# Altium PCB Juno_Light_Central.PcbDoc
Units mm, origin at the board's own origin, x right, y up, seen from the top; angles counter-clockwise.
Board outline 16 x 45 mm, 2 copper layers (Top Layer, Bottom Layer), stack 1.172 mm thick; 24 components, 23 nets, 120 pads, 33 vias.
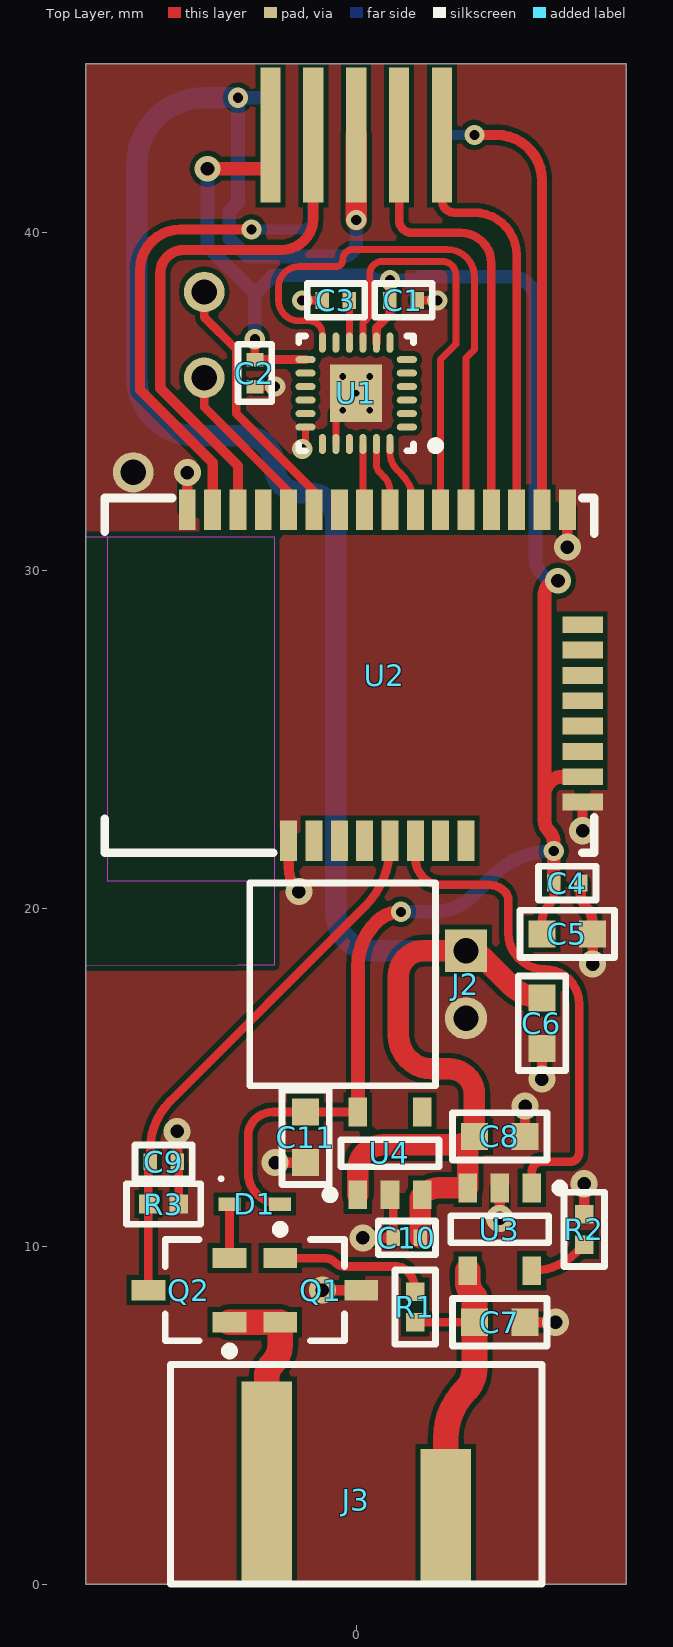
[diagram p0: Top Layer view]
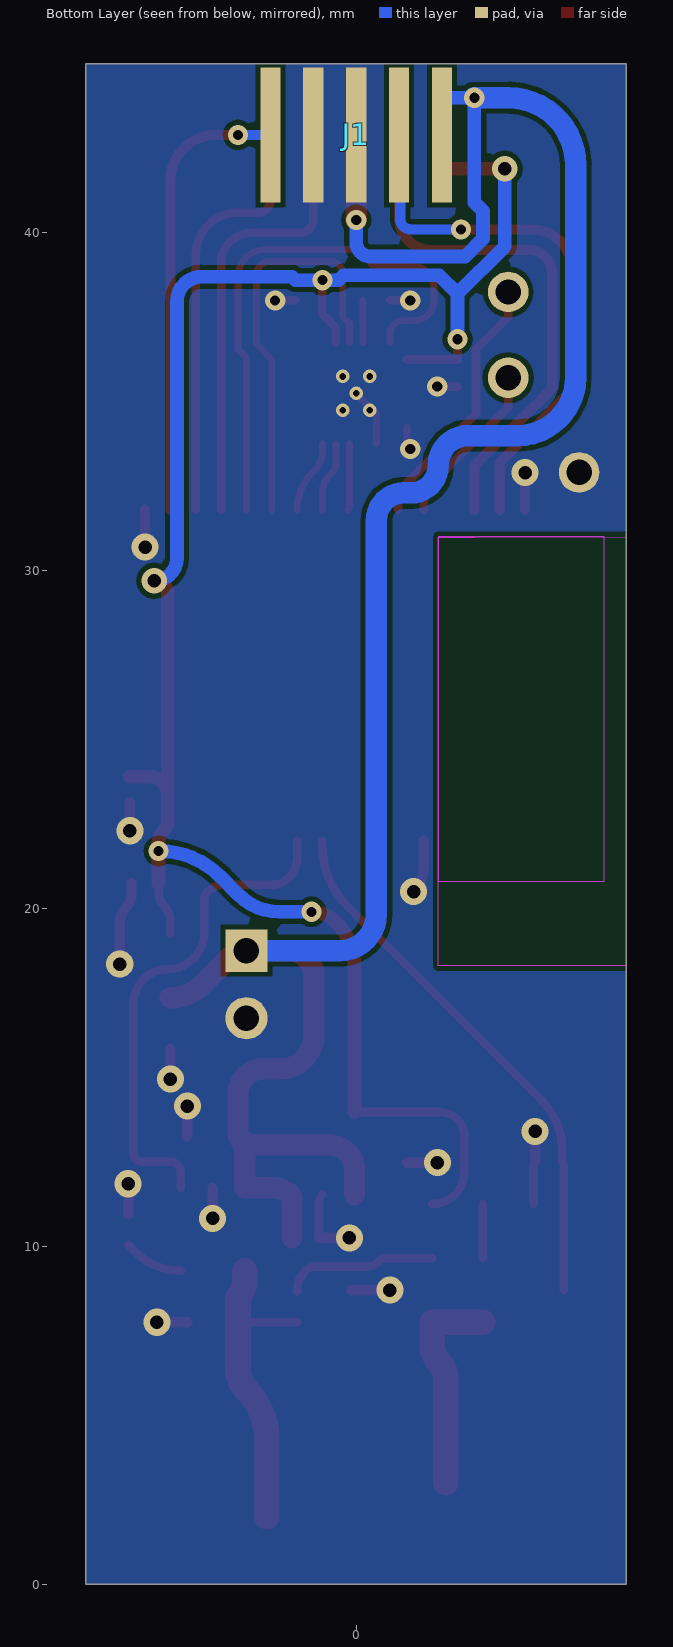
[diagram p1: Bottom Layer view, seen from below]
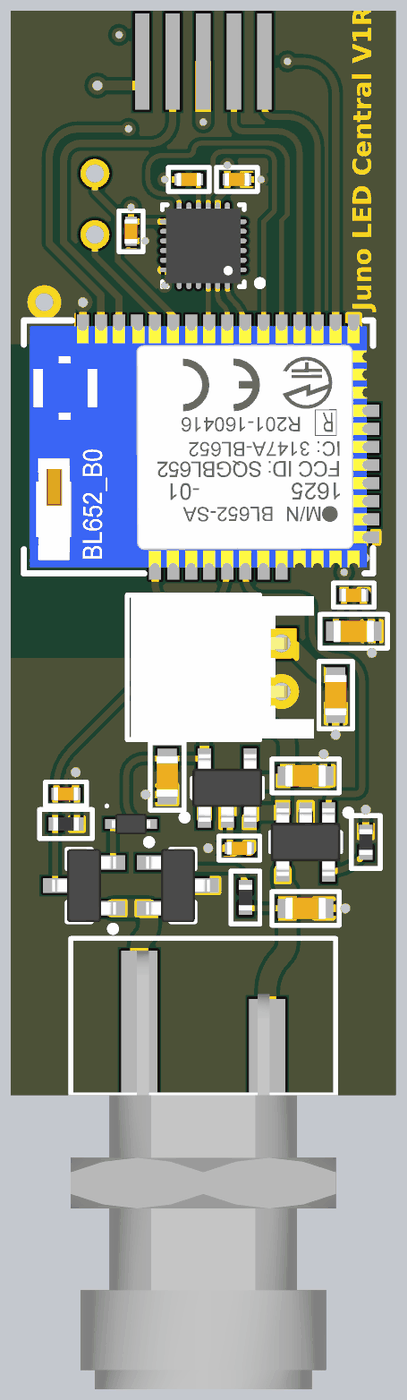
[diagram p2: 3D render of the assembled board from above, using the file's embedded part models]

## Layer stack, top to bottom
Top Solder: solder mask 0.0102, Solder Resist, Dk 3.5
Top Layer: signal copper 0.0356
Dielectric 1: dielectric 1.1004, FR-4, Dk 4.8
Bottom Layer: signal copper 0.0356
Bottom Solder: solder mask 0.0102, Solder Resist, Dk 3.5

## Board outline
-8,0 -8,45 8,45 8,0

## Design rules (kind name [scope] priority, off if disabled: settings)
Clearance [All] p1: gap=0.152 ignorepadtopadclearanceinfootprint=FALSE
PlaneConnect [All] p1: planeconnectstyle=Direct reliefexpansion=0.508 reliefentries=4 reliefconductorwidth=0.254 reliefairgap=0.254
PolygonConnect [All] p1: connectstyle=Direct reliefconductorwidth=0.254 reliefentries=4 polygonreliefangle="90 Angle" airgapwidth=0.254
RoutingVias [All] p1: holewidth=0.711 width=1.27 viastyle="Through Hole" minholewidth=0.711 minwidth=1.27 maxholewidth=0.711 maxwidth=1.27
SolderMaskExpansion [All] p1: expansion=0.102
Width [All] p1: maxlimit=0.762 minlimit=0.152 preferedwidth=0.254
29 further rules are at their usual default settings.

## Components (designator, comment, footprint, x,y, rotation, side; value= is the part's Value field where it differs from the comment)
C1 "0.1uF" C0402 1.4,38 r0 top
C2 "0.01uF" C0402 -3,35.85 r270 top
C3 "0.1uF" C0402 -0.6,38 r180 top
C4 "0.1uF" C0402 6.25,20.75 r180 top
C5 "4.7uF" C0603 6.25,19.25 r0 top
C6 "4.7uF" C0603 5.5,16.6 r270 top
C7 "4.7uF" C0603 4.25,7.75 r0 top
C8 "4.7uF" C0603 4.25,13.25 r0 top
C9 "1uF" C0402 -5.7,12.5 r0 top
C10 "1uF" C0402 1.5,10.25 r180 top
C11 "4.7uF" C0603 -1.5,13.225 r270 top
D1 "1N4148X-TP" SOD-523 -3,11.25 r0 top
J1 "PADS" Pads 0,42.9 r180 bottom
J2 "BATT" S2B-PH-K-S 4.6,17.75 r90 top
J3 "2.1mm Barrel Power Jack" "2.1mm Power Jack" 0,0 r180 top
Q1 "N-FET" SOT-23-3 -1.05,8.7 r0 top
Q2 "PNP DARLINGTON" SOT-23-3 -4.95,8.7 r180 top
R1 "100" R0402 1.75,8.2 r90 top
R2 "2K" R0402 6.75,10.5 r90 top
R3 "1M" R0402 -5.7,11.25 r180 top
U1 "MPU-6500" QFN-24 0,35.25 r180 top
U2 "BL652-SA-01" BL652-SA-01 6.8,26.9 r90 top
U3 "BATT_CHRG" SOT-23-5 4.25,10.5 r270 top
U4 "TPS76333DBVT" SOT-23-5 1,12.75 r90 top

## Footprints (in the part's own frame and the unit in brackets; to place one, negate y for a bottom-side part, rotate by r counter-clockwise, add the part's x,y. Pads: shape width x height; smd on the part's side, far side on the other; paste and mask are expansions set on the pad)
"2.1mm Power Jack" [mm]
  rect 1.5x4 smd: 1(-2.65,-2)
  rect 1.5x6 smd: 2(2.65,-3)
  silkscreen extent -5.5,-6.5 5.5,0, body extent -5.5,-5.99 5.5,12.2, height 7.55
BL652-SA-01 [mm]
  rect 1.2x0.5 smd: 1(4.9,11.8) 2(4.9,11.05) 3(4.9,10.3) 4(4.9,9.55) 5(4.9,8.8) 6(4.9,8.05) 7(4.9,7.3) 8(4.9,6.55) 9(4.9,5.8) 10(4.9,5.05) 11(4.9,4.3) 12(4.9,3.55) 13(4.9,2.8) 14(4.9,2.05) 15(4.9,1.3) 16(4.9,0.55) 32(-4.9,3.55) 33(-4.9,4.3) 34(-4.9,5.05) 35(-4.9,5.8) 36(-4.9,6.55) 37(-4.9,7.3) 38(-4.9,8.05) 39(-4.9,8.8)
  rect 0.5x1.2 smd: 20(1.5,0.1) 21(0.75,0.1) 22(0,0.1) 23(-0.75,0.1) 24(-1.5,0.1) 25(-2.25,0.1) 26(-3,0.1) 27(-3.75,0.1)
  Keep-Out Layer region: 4.1,9.225 -6.1,9.225 -6.1,14.15 4.1,14.15
  silkscreen extent -5.25,-0.25 5.25,14.25, body extent -5.01,0 5.01,14.01, height 2.9
C0402 [mm] "Chip Capacitor, 2-Leads, Body 1.00x0.50mm, IPC Medium Density"
  rect 0.4x0.5 smd: 1(-0.4,0) 2(0.4,0)
  silkscreen extent -0.85,-0.5 0.85,0.5, body extent -0.53,-0.28 0.53,0.28, height 0.55
C0603 [mm] "Chip Capacitor, 2-Leads, Body 1.60x0.80mm, IPC Medium Density"
  rect 0.8x0.8 smd: 1(-0.75,0) 2(0.75,0)
  silkscreen extent -1.4,-0.7 1.4,0.7, body extent -0.85,-0.45 0.85,0.45, height 0.9
Pads [mm]
  rect 0.6x4 smd: 1(-2.54,0) 2(-1.27,0) 3(0,0) 4(1.27,0) 5(2.54,0)
  rect 0.6x4 smd far side: 6(2.54,0) 7(1.27,0) 8(0,0) 9(-1.27,0) 10(-2.54,0)
QFN-24 [mm] "QFN, 24-Leads, Body 3.00x3.00mm, Pitch 0.40mm, Thermal Pad 1.54x1.70mm, IPC Medium Density"
  oval 0.6x0.2 smd: 1(-1.5,1) 2(-1.5,0.6) 3(-1.5,0.2) 4(-1.5,-0.2) 5(-1.5,-0.6) 6(-1.5,-1) 13(1.5,-1) 14(1.5,-0.6) 15(1.5,-0.2) 16(1.5,0.2) 17(1.5,0.6) 18(1.5,1)
  oval 0.2x0.6 smd: 7(-1,-1.5) 8(-0.6,-1.5) 9(-0.2,-1.5) 10(0.2,-1.5) 11(0.6,-1.5) 12(1,-1.5) 19(1,1.5) 20(0.6,1.5) 21(0.2,1.5) 22(-0.2,1.5) 23(-0.6,1.5) 24(-1,1.5)
  rect 1.54x1.7 smd: 25(0,0)
  silkscreen extent -2.48,-1.7 1.7,1.7, body extent -1.56,-1.56 1.56,1.56, height 0.9
R0402 [mm] "Chip Resistor, 2-Leads, Body 1.00x0.50mm, IPC Medium Density"
  rect 0.55x0.55 smd: 1(-0.45,0) 2(0.45,0)
  silkscreen extent -1.1,-0.6 1.1,0.6, body extent -0.53,-0.28 0.53,0.28, height 0.4
S2B-PH-K-S [mm]
  rect 1.25x1.25 hole 0.75: 1(1,1.35)
  round 1.25 hole 0.75: 2(-1,1.35)
  silkscreen extent -3,2.25 3,7.75, body extent -2.95,0 2.95,7.6, height 4.9
SOD-523 [mm] "SODFL, 2-Leads, Body 0.80x1.60mm, IPC Medium Density"
  rect 0.65x0.4 smd: 1(-0.75,0) 2(0.75,0)
  silkscreen extent -1.05,0.7 -0.95,0.8, body extent -0.8,-0.43 0.8,0.43, height 0.77
SOT-23-3 [mm] "SOT23, 3-Leads, Body 2.92x2.37mm, Pitch 0.95mm, IPC Medium Density"
  rect 1x0.6 smd: 1(-1.2,0.95) 2(-1.2,-0.95) 3(1.2,0)
  silkscreen extent -1.32,-1.5 0.7,1.92, body extent -1.32,-1.52 1.32,1.52, height 1.1
SOT-23-5 [mm] "SOT23, 5-Leads, Body 2.90x2.80mm, Pitch 0.95mm, IPC High Density"
  rect 0.85x0.55 smd: 1(-1.225,0.95) 2(-1.225,0) 3(-1.225,-0.95) 4(1.225,-0.95) 5(1.225,0.95)
  silkscreen extent -1.35,-1.45 0.4,1.9, body extent -1.4,-1.45 1.4,1.45, height 1.45

## Part data
C1 C3 C4: library part CL05B104KO5NNNC, "Cap Ceramic 0.1uF 16V X7R 10% SMD 0402 125C C/T", Capacitance=100nF, Case/Package=0402, Case Code (Metric)=1005, Dielectric=X7R, Manufacturer 1=Samsung, Max Operating Temperature=125°C, Min Operating Temperature=-55°C, Package Quantity=1, Supplier Part Number 1=1276-1001-6-ND, Tolerance=10%, Voltage=16V, Case Code (Imperial)=0402, ComponentLink1Description=https://datasheet.ciiva.com/16208/cl05b104kq5nnnc-16208343.pdf, ComponentLink1URL=https://datasheet.ciiva.com/16208/cl05b104kq5nnnc-16208343.pdf, ComponentLink2Description=https://datasheet.ciiva.com/26920/getdatasheetpartid-359683-26920169.pdf, ComponentLink2URL=https://datasheet.ciiva.com/26920/getdatasheetpartid-359683-26920169.pdf, ComponentLink3Description=https://datasheet.ciiva.com/26309/mlcc-catalogdownload2013-eng-26309003.pdf, ComponentLink3URL=https://datasheet.ciiva.com/26309/mlcc-catalogdownload2013-eng-26309003.pdf, ComponentLink4Description=https://datasheet.ciiva.com/29198/458718-da-01-en-vs-kondensator-0402-29198423.pdf, ComponentLink4URL=https://datasheet.ciiva.com/29198/458718-da-01-en-vs-kondensator-0402-29198423.pdf, Contact Plating=Tin, Depth=0.5mm, Description 1="Cap Ceramic 0.1uF 16V X7R 10% SMD 0402 125C Paper T/R", Height=0.5mm, Lead Free="Lead Free", Length=1mm, Manufacturer Part Number 1=CL05B104KO5NNNC, Material=Ceramic, Mount="Surface Mount", Packaging="Tape and Reel", Pricing 1="1=0.1, 10=0.018, 100=0.0081, 500=0.0058, 1000=0.0045, 2500=0.0041, 5000=0.0038 (USD)", Radiation Hardening=No, Stock 1=9531, Supplier 1=Digi-Key, Thickness=0.022inch, Voltage Rating=16V, Voltage Rating (DC)=16V, Width=0.02inch
C2: library part GRM155R71E103KA01D, "CAP CER 10000PF 25V X7R 0402", Capacitance=10nF, Case/Package=0402, Case Code (Metric)=1005, Dielectric=X7R, Dielectric Material=Ceramic, Insulation Resistance=10GR, Manufacturer=Murata, Max Operating Temperature=125°C, Min Operating Temperature=-55°C, Package Quantity=1, Supplier Part Number 1=490-1312-1-ND, Tolerance=10%, Voltage=25V, Case Code (Imperial)=0402, ComponentLink1Description=https://datasheet.ciiva.com/11786/0900766b807a1cab-11786320.pdf, ComponentLink1URL=https://datasheet.ciiva.com/11786/0900766b807a1cab-11786320.pdf, ComponentLink2Description=https://datasheet.ciiva.com/18184/getdatasheetpartid-161489-18184689.pdf, ComponentLink2URL=https://datasheet.ciiva.com/18184/getdatasheetpartid-161489-18184689.pdf, ComponentLink3Description=https://datasheet.ciiva.com/28534/1699889-28534148.pdf, ComponentLink3URL=https://datasheet.ciiva.com/28534/1699889-28534148.pdf, ComponentLink4Description=https://datasheet.ciiva.com/7937/1747448-7937621.pdf, ComponentLink4URL=https://datasheet.ciiva.com/7937/1747448-7937621.pdf, ComponentLink5Description=https://datasheet.ciiva.com/16199/product-16199034.pdf, ComponentLink5URL=https://datasheet.ciiva.com/16199/product-16199034.pdf, ComponentLink6Description=https://datasheet.ciiva.com/3777/3813grm155r71e103ka0123-3777115.pdf, ComponentLink6URL=https://datasheet.ciiva.com/3777/3813grm155r71e103ka0123-3777115.pdf, ComponentLink7Description=https://datasheet.ciiva.com/129/partnumbering-e-01-129741.pdf, ComponentLink7URL=https://datasheet.ciiva.com/129/partnumbering-e-01-129741.pdf, ComponentLink8Description=https://datasheet.ciiva.com/129/partnumbering-e-01-129742.pdf, ComponentLink8URL=https://datasheet.ciiva.com/129/partnumbering-e-01-129742.pdf, ComponentLink9Description=https://datasheet.ciiva.com/129/partnumbering-e-01-129743.pdf, ComponentLink9URL=https://datasheet.ciiva.com/129/partnumbering-e-01-129743.pdf, ComponentLink10Description=https://datasheet.ciiva.com/29199/454154-da-01-en-vs-kondensator-0402-29199817.pdf, ComponentLink10URL=https://datasheet.ciiva.com/29199/454154-da-01-en-vs-kondensator-0402-29199817.pdf, Depth=0.5mm, Height=0.5mm, Lead Free="Lead Free", Length=1mm, Manufacturer Part Number=GRM155R71E103KA01D, Material=Ceramic, Mount="Surface Mount", Number of Pins=2, Packaging="Tape and Reel", Pricing 1="1=0.1, 10=0.03, 100=0.0134, 500=0.00958, 1000=0.00753, 2500=0.00684, 5000=0.0063 (USD)", Radiation Hardening=No, REACH SVHC="No SVHC", Stock 1=100000, Supplier 1=Digi-Key, Termination=SMD/SMT, Thickness=0.022inch, Voltage Rating=25V, Voltage Rating (DC)=25V, Width=0.5mm
C5 C6 C7 C8 C11: library part CC0603KRX5R6BB475, "4.7µF ±10% 10V X5R Ceramic Capacitor -55°C ~ 85°C Surface Mount, MLCC 0603 (1608 Metric) 0.063\" L x 0.031\" W (1.60mm x 0.80mm)", Case/Package=0603, Case Code (Metric)=1608, Dielectric=X5R, Manufacturer 1=Yageo, Max Operating Temperature=85°C, Min Operating Temperature=-55°C, Package Quantity=1, Supplier Part Number 1=311-1455-6-ND, Tolerance=10%, Voltage Rating=10V, Capacitance=4.7uF, Case Code (Imperial)=0603, ComponentLink1Description=https://datasheet.ciiva.com/8033/1525783-8033798.pdf, ComponentLink1URL=https://datasheet.ciiva.com/8033/1525783-8033798.pdf, ComponentLink2Description=https://datasheet.ciiva.com/179/mlccorderingcode-179704.pdf, ComponentLink2URL=https://datasheet.ciiva.com/179/mlccorderingcode-179704.pdf, ComponentLink3Description=https://datasheet.ciiva.com/179/mlccorderingcode-179705.pdf, ComponentLink3URL=https://datasheet.ciiva.com/179/mlccorderingcode-179705.pdf, ComponentLink4Description=https://datasheet.ciiva.com/179/mlccorderingcode-179706.pdf, ComponentLink4URL=https://datasheet.ciiva.com/179/mlccorderingcode-179706.pdf, ComponentLink5Description=https://datasheet.ciiva.com/8033/1525783-8033802.pdf, ComponentLink5URL=https://datasheet.ciiva.com/8033/1525783-8033802.pdf, ComponentLink6Description=https://datasheet.ciiva.com/11586/upy-gphc-x5r-4v-to-50v-12-11586314.pdf, ComponentLink6URL=https://datasheet.ciiva.com/11586/upy-gphc-x5r-4v-to-50v-12-11586314.pdf, ComponentLink7Description=https://datasheet.ciiva.com/16623/upy-gphc-x5r-4v-to-50v-12-16623983.pdf, ComponentLink7URL=https://datasheet.ciiva.com/16623/upy-gphc-x5r-4v-to-50v-12-16623983.pdf, Composition=Ceramic, Depth=0.8mm, Description 1="4.7µF ±10% 10V X5R Ceramic Capacitor -55°C ~ 85°C Surface Mount, MLCC 0603 (1608 Metric) 0.063\" L x 0.031\" W (1.60mm x 0.80mm)", Halogen Free="Halogen Free", Height=0.8mm, Lead Free="Lead Free", Length=1.6mm, Manufacturer Part Number 1=CC0603KRX5R6BB475, Mount="Surface Mount", Packaging="Tape and Reel", Pricing 1="1=0.16, 10=0.115, 100=0.0543, 500=0.0381, 1000=0.0315 (USD)", Radiation Hardening=No, REACH SVHC=Unknown, Stock 1=166715, Supplier 1=Digi-Key, Termination=SMD/SMT, Thickness=0.035inch, Voltage Rating (DC)=10V, Width=0.8mm
C9 C10: library part CL05A105MP5NNNC, "Cap Ceramic 1uF 10V X5R 20% SMD 0402 85C C/T", Case/Package=0402, Case Code (Metric)=1005, Dielectric=X5R, Manufacturer 1=Samsung, Max Operating Temperature=85°C, Min Operating Temperature=-55°C, Package Quantity=1, Supplier Part Number 1=1276-1448-6-ND, Tolerance=20%, Voltage Rating=10V, Capacitance=1uF, Case Code (Imperial)=0402, ComponentLink1Description=https://datasheet.ciiva.com/25802/cl05a105mp5nnnc-25802049.pdf, ComponentLink1URL=https://datasheet.ciiva.com/25802/cl05a105mp5nnnc-25802049.pdf, Depth=0.5mm, Description 1="Cap Ceramic 1uF 10V X5R 20% SMD 0402 85C Paper T/R", Height=0.5mm, Lead Free="Lead Free", Length=1mm, Manufacturer Part Number 1=CL05A105MP5NNNC, Mount="Surface Mount", Packaging="Tape and Reel", Pricing 1="1=0.1, 10=0.028, 100=0.0124, 500=0.0089, 1000=0.007, 2500=0.0063, 5000=0.0058 (USD)", Radiation Hardening=No, Stock 1=42775, Supplier 1=Digi-Key, Thickness=0.022inch, Voltage Rating (DC)=10V, Width=0.02inch
D1: Average Rectified Current=150mA, Capacitance=2pF, Forward Current=300mA, Forward Voltage=1.25V, Manufacturer 1=MCC, Max Operating Temperature=150°C, Max Repetitive Reverse Voltage (Vrrm)=100V, Max Reverse Leakage Current=1uA, Max Reverse Voltage (DC)=75V, Max Surge Current=2A, Min Operating Temperature=-65°C, Package Quantity=1, Power Dissipation=200mW, Supplier Part Number 1=1N4148XTPMSCT-ND, ComponentLink1Description=http://www.mccsemi.com/up_pdf/1N4148X(SOD-523).PDF?src-supplier=Digi-Key, ComponentLink1URL=http://www.mccsemi.com/up_pdf/1N4148X(SOD-523).PDF?src-supplier=Digi-Key, ComponentLink2Description=http://www.mouser.com/ds/2/258/1N4148X(SOD-523)-349105.pdf?src-supplier=Mouser, ComponentLink2URL=http://www.mouser.com/ds/2/258/1N4148X(SOD-523)-349105.pdf?src-supplier=Mouser, ComponentLink3Description=http://www.mccsemi.com/up_pdf/1N4148X(SOD-523).PDF?src-supplier=Future+Electronics, ComponentLink3URL=http://www.mccsemi.com/up_pdf/1N4148X(SOD-523).PDF?src-supplier=Future+Electronics, Current Rating=150mA, Element Configuration=Single, Lead Free="Lead Free", Manufacturer Part Number 1=1N4148X-TP, Mount="Surface Mount", Number of Pins=2, Output Current=300mA, Packaging="Tape and Reel", Peak Non-Repetitive Surge Current=2A, Polarity=Standard, Pricing 1="1=0.14, 10=0.125, 100=0.0815, 500=0.03986, 1000=0.02718 (USD)", Radiation Hardening=No, Recovery Time=4ns, Reverse Recovery Time=4ns, Stock 1=2136057, Supplier 1=Digi-Key, Voltage Rating (DC)=75V
J2: library part S2B-PH-K-S(LF)(SN), "CONN HEADER R/A 2POS 2MM", Color=Natural,White, Contact Resistance=20mR, Current Rating=2A, Flammability Rating="UL94 V-0", Housing Color=White, Insulation Resistance=1GR, Manufacturer 1=JST, Max Operating Temperature=85°C, Max Voltage Rating (AC)=100V, Min Operating Temperature=-25°C, Supplier Part Number 1=455-1719-ND, ComponentLink1Description=http://www1.futureelectronics.com/doc/JST/S2B-PH-K-S(LF)(SN).pdf?src-supplier=Future+Electronics, ComponentLink1URL=http://www1.futureelectronics.com/doc/JST/S2B-PH-K-S(LF)(SN).pdf?src-supplier=Future+Electronics, ComponentLink2Description=https://www.verical.com/server-webapp/html/getDatasheet?partID=641020&src-supplier=Verical, ComponentLink2URL=https://www.verical.com/server-webapp/html/getDatasheet?partID=641020&src-supplier=Verical, ComponentLink3Description=http://www.jst-mfg.com/product/pdf/eng/ePH.pdf?src-supplier=Digi-Key, ComponentLink3URL=http://www.jst-mfg.com/product/pdf/eng/ePH.pdf?src-supplier=Digi-Key, ComponentLink4Description=http://www.farnell.com/datasheets/80564.pdf?src-supplier=Element14, ComponentLink4URL=http://www.farnell.com/datasheets/80564.pdf?src-supplier=Element14, Connector Type="Male Pin", Contact Material=Tin,Brass,Bronze, Contact Mating Length=0.13inch, Contact Plating=Tin,Copper, Depth=7.6mm, Fastening Type=Detent, Gender=Male, Height=9.4mm, Housing Material=Polyamide, Lead Free="Lead Free", Lead Pitch=2mm, Length=5.9mm, Manufacturer Part Number 1=S2B-PH-K-S(LF)(SN), Max Current Rating=2A, Max Voltage Rating (DC)=100V, Mount="Through Hole", Number of Contacts=2, Number of Pins=2, Number of Poles=2, Number of Positions=2, Number of Rows=1, Orientation="Right Angle", Packaging=Bulk, Pitch=2mm, Pricing 1="1=0.17, 10=0.161, 100=0.0991, 500=0.08202, 1000=0.07177, 5000=0.06152, 10000=0.05981 (USD)", REACH SVHC="No SVHC", Stock 1=161668, Supplier 1=Digi-Key, Termination=Solder, Voltage Rating=100V, Voltage Rating (AC)=100V, Width=4.5mm, Working Voltage=100V
J3: "2.1mm Barrel Power Jack Panel Mount"
Q1: library part NDS331N, "MOSFET N-CH 20V 1.3A SSOT3", Case/Package=TO-236-3, Continuous Drain Current (ID)=1.3A, Drain to Source Breakdown Voltage=20V, Drain to Source Resistance=210mR, Gate to Source Voltage (Vgs)=8V, Input Capacitance=162pF, Manufacturer 1="ON Semiconductor / Fairchild", Max Operating Temperature=150°C, Max Power Dissipation=500mW, Min Operating Temperature=-55°C, On-State Resistance=160mR, Package Quantity=1, Supplier Part Number 1=NDS331NCT-ND, Threshold Voltage=700mV, ComponentLink1Description=http://www.farnell.com/datasheets/2303897.pdf?src-supplier=Newark, ComponentLink1URL=http://www.farnell.com/datasheets/2303897.pdf?src-supplier=Newark, ComponentLink2Description=http://www.farnell.com/datasheets/195775.pdf?src-supplier=Element14, ComponentLink2URL=http://www.farnell.com/datasheets/195775.pdf?src-supplier=Element14, ComponentLink3Description=https://www.verical.com/server-webapp/html/getDatasheet?partID=110520&src-supplier=Verical, ComponentLink3URL=https://www.verical.com/server-webapp/html/getDatasheet?partID=110520&src-supplier=Verical, ComponentLink4Description=http://www.jameco.com/Jameco/Products/ProdDS/1030703.pdf?src-supplier=Jameco, ComponentLink4URL=http://www.jameco.com/Jameco/Products/ProdDS/1030703.pdf?src-supplier=Jameco, ComponentLink5Description=http://www.mouser.com/ds/2/149/NDS331N-116501.pdf?src-supplier=Mouser, ComponentLink5URL=http://www.mouser.com/ds/2/149/NDS331N-116501.pdf?src-supplier=Mouser, ComponentLink6Description=https://www.fairchildsemi.com/datasheets/ND/NDS331N.pdf?src-supplier=Avnet, ComponentLink6URL=https://www.fairchildsemi.com/datasheets/ND/NDS331N.pdf?src-supplier=Avnet, ComponentLink7Description=http://www.fairchildsemi.com/ds/ND/NDS331N.pdf?src-supplier=Avnet+Europe, ComponentLink7URL=http://www.fairchildsemi.com/ds/ND/NDS331N.pdf?src-supplier=Avnet+Europe, Current Rating=1.3A, Drain to Source Voltage (Vdss)=20V, Element Configuration=Single, Fall Time=5ns, Height=0.94mm, Lead Free="Lead Free", Length=2.92mm, Manufacturer Part Number 1=NDS331N, Mount="Surface Mount", Nominal Vgs=700mV, Number of Elements=1, Number of Pins=3, Packaging="Tape and Reel", Power Dissipation=500mW, Pricing 1="1=0.44, 10=0.349, 100=0.2395, 500=0.16424, 1000=0.12318 (USD)", Radiation Hardening=No, Rds On Max=160mR, REACH SVHC="No SVHC", Rise Time=25ns, Stock 1=114658, Supplier 1=Digi-Key, Turn-Off Delay Time=10ns, Turn-On Delay Time=5ns, Voltage Rating (DC)=20V, Weight=0.03g, Width=1.4mm
Q2: library part MMBTA63LT1G, Case/Package=SOT-23-3, Collector Base Voltage (VCBO)=30V, Collector Emitter Saturation Voltage=1.5V, Continuous Collector Current=-500mA, Emitter Base Voltage (VEBO)=10V, Manufacturer 1="ON Semiconductor", Max Collector Current=500mA, Max Operating Temperature=150°C, Max Power Dissipation=225mW, Min Operating Temperature=-55°C, Package Quantity=1, Supplier Part Number 1=MMBTA63LT1GOSCT-ND, Transition Frequency=125MHz, Voltage Rating (DC)=-30V, Collector Emitter Breakdown Voltage=30V, Collector Emitter Voltage (VCEO)=30V, ComponentLink1Description=http://www.onsemi.com/pub/Collateral/MMBTA63LT1-D.PDF?src-supplier=Avnet, ComponentLink1URL=http://www.onsemi.com/pub/Collateral/MMBTA63LT1-D.PDF?src-supplier=Avnet, ComponentLink2Description=http://www.onsemi.com/pub/Collateral/MMBTA63LT1-D.PDF?src-supplier=Digi-Key, ComponentLink2URL=http://www.onsemi.com/pub/Collateral/MMBTA63LT1-D.PDF?src-supplier=Digi-Key, ComponentLink3Description=http://www.onsemi.com/pub/Collateral/MMBTA63LT1-D.PDF?src-supplier=Future+Electronics, ComponentLink3URL=http://www.onsemi.com/pub/Collateral/MMBTA63LT1-D.PDF?src-supplier=Future+Electronics, ComponentLink4Description=http://www.jameco.com/Jameco/Products/ProdDS/2011408.pdf?src-supplier=Jameco, ComponentLink4URL=http://www.jameco.com/Jameco/Products/ProdDS/2011408.pdf?src-supplier=Jameco, Contact Plating=Tin,Matte, Current Rating=-500mA, Element Configuration=Single, Halogen Free="Halogen Free", Height=1.01mm, hFE Min=5000, Lead Free="Lead Free", Length=3.04mm, Manufacturer Part Number 1=MMBTA63LT1G, Max Breakdown Voltage=30V, Number of Elements=1, Number of Pins=3, Packaging="Tape and Reel", Polarity=PNP, Power Dissipation=225mW, Pricing 1="1=0.22, 10=0.203, 100=0.1106, 500=0.06806, 1000=0.0464 (USD)", Radiation Hardening=No, REACH SVHC="No SVHC", Stock 1=102027, Supplier 1=Digi-Key, Weight=0.01lb, Width=1.4mm
R1: library part ERJ-2GEJ101X, "Res Thick Film 0402 100 Ohm 5% 0.1W(1/10W) ±200ppm/C Molded SMD Automotive T/R", Case/Package=0402, Case Code (Metric)=1005, Manufacturer 1="Panasonic ECG", Max Operating Temperature=155°C, Max Power Dissipation=100mW, Min Operating Temperature=-55°C, Package Quantity=1, Resistance=100R, Supplier Part Number 1=P100JDKR-ND, Temperature Coefficient=200ppm/°C, Tolerance=5%, Voltage Rating=50V, Case Code (Imperial)=0402, ComponentLink1Description=https://datasheet.ciiva.com/11821/0900766b80f806dd-11821172.pdf, ComponentLink1URL=https://datasheet.ciiva.com/11821/0900766b80f806dd-11821172.pdf, ComponentLink2Description=https://datasheet.ciiva.com/16767/70260739-16767557.pdf, ComponentLink2URL=https://datasheet.ciiva.com/16767/70260739-16767557.pdf, ComponentLink3Description=https://datasheet.ciiva.com/48531/aoa0000ce1-48531079.pdf, ComponentLink3URL=https://datasheet.ciiva.com/48531/aoa0000ce1-48531079.pdf, ComponentLink4Description=https://datasheet.ciiva.com/16511/aoa0000ce1-16511417.pdf, ComponentLink4URL=https://datasheet.ciiva.com/16511/aoa0000ce1-16511417.pdf, ComponentLink5Description=https://datasheet.ciiva.com/16777/70260739-16777609.pdf, ComponentLink5URL=https://datasheet.ciiva.com/16777/70260739-16777609.pdf, ComponentLink6Description=https://datasheet.ciiva.com/9186/aoa0000ce1-9186682.pdf, ComponentLink6URL=https://datasheet.ciiva.com/9186/aoa0000ce1-9186682.pdf, ComponentLink7Description=https://datasheet.ciiva.com/17207/aoa0000ce1-17207978.pdf, ComponentLink7URL=https://datasheet.ciiva.com/17207/aoa0000ce1-17207978.pdf, ComponentLink8Description=https://datasheet.ciiva.com/30133/4aoa0000ce1-30133884.pdf, ComponentLink8URL=https://datasheet.ciiva.com/30133/4aoa0000ce1-30133884.pdf, ComponentLink9Description=https://datasheet.ciiva.com/46389/1500035-46389644.pdf, ComponentLink9URL=https://datasheet.ciiva.com/46389/1500035-46389644.pdf, ComponentLink10Description=https://datasheet.ciiva.com/43460/1500035-43460365.pdf, ComponentLink10URL=https://datasheet.ciiva.com/43460/1500035-43460365.pdf, Composition="Thick Film", Contact Plating=Tin, Depth=0.5mm, Description 1="Res Thick Film 0402 100 Ohm 5% 0.1W(1/10W) ±200ppm/C Molded SMD Automotive T/R", Height=0.35mm, Lead Free="Lead Free", Length=1mm, Manufacturer Part Number 1=ERJ-2GEJ101X, Military Standard=Not, Mount="Surface Mount", Number of Terminations=2, Packaging="Cut Tape", Power Rating=100mW, Pricing 1="1=0.1, 10=0.029, 100=0.0117, 1000=0.0053, 2500=0.0046, 5000=0.0038 (USD)", Radiation Hardening=No, REACH SVHC="No SVHC", Stock 1=1981514, Supplier 1=Digi-Key, Termination=SMD/SMT, Voltage Rating (DC)=50V, Width=0.5mm
R2: library part ERJ2RKF2001X, "RES SMD 2K OHM 1% 1/10W 0402", Case/Package=0402, Case Code (Metric)=1005, Manufacturer 1=Panasonic, Max Operating Temperature=155°C, Max Power Dissipation=100mW, Min Operating Temperature=-55°C, Package Quantity=10000, Resistance=2kR, Supplier Part Number 1=P2.00KLCT-ND, Temperature Coefficient=100ppm/°C, Tolerance=1%, Voltage Rating=50V, Case Code (Imperial)=0402, ComponentLink1Description=http://www.farnell.com/datasheets/1678782.pdf?src-supplier=Element14, ComponentLink1URL=http://www.farnell.com/datasheets/1678782.pdf?src-supplier=Element14, ComponentLink2Description=https://industrial.panasonic.com/cdbs/www-data/pdf/RDA0000/DMA0000COL11.pdf?src-supplier=Avnet, ComponentLink2URL=https://industrial.panasonic.com/cdbs/www-data/pdf/RDA0000/DMA0000COL11.pdf?src-supplier=Avnet, ComponentLink3Description=https://industrial.panasonic.com/cdbs/www-data/pdf/RDA0000/AOA0000C304.pdf?src-supplier=Future+Electronics, ComponentLink3URL=https://industrial.panasonic.com/cdbs/www-data/pdf/RDA0000/AOA0000C304.pdf?src-supplier=Future+Electronics, ComponentLink4Description=http://www.farnell.com/datasheets/1911175.pdf?src-supplier=Farnell, ComponentLink4URL=http://www.farnell.com/datasheets/1911175.pdf?src-supplier=Farnell, ComponentLink5Description=http://www.farnell.com/datasheets/426256.pdf?src-supplier=Element14, ComponentLink5URL=http://www.farnell.com/datasheets/426256.pdf?src-supplier=Element14, ComponentLink6Description=http://industrial.panasonic.com/www-data/pdf/AOA0000/AOA0000CE2.pdf?src-supplier=Avnet+Asia, ComponentLink6URL=http://industrial.panasonic.com/www-data/pdf/AOA0000/AOA0000CE2.pdf?src-supplier=Avnet+Asia, ComponentLink7Description=http://www.alliedelec.com/m/d/623f45ff1957d936ff56d46fd1c28cac.pdf?src-supplier=Allied+Electronics, ComponentLink7URL=http://www.alliedelec.com/m/d/623f45ff1957d936ff56d46fd1c28cac.pdf?src-supplier=Allied+Electronics, ComponentLink8Description=http://www.mouser.com/ds/2/315/AOA0000CE2-37512.pdf?src-supplier=Mouser, ComponentLink8URL=http://www.mouser.com/ds/2/315/AOA0000CE2-37512.pdf?src-supplier=Mouser, ComponentLink9Description=http://industrial.panasonic.com/www-data/pdf/AOA0000/AOA0000CE2.pdf?src-supplier=Avnet, ComponentLink9URL=http://industrial.panasonic.com/www-data/pdf/AOA0000/AOA0000CE2.pdf?src-supplier=Avnet, Composition="Thick Film", Contact Plating=Tin, Depth=0.5mm, Features="Automotive AEC-Q200", Height=0.35mm, Lead Free="Lead Free", Length=1mm, Manufacturer Part Number 1=ERJ2RKF2001X, Military Standard=Not, Mount="Surface Mount", Number of Terminations=2, Packaging="Tape and Reel", Power Rating=100mW, Pricing 1="1=0.1, 10=0.045, 100=0.0183, 1000=0.00823, 2500=0.00715, 5000=0.0059 (USD)", Radiation Hardening=No, REACH SVHC="No SVHC", Stock 1=3588028, Supplier 1=Digi-Key, Termination=SMD/SMT, Voltage Rating (DC)=50V, Width=0.02inch, Working Voltage=50V
R3: library part RC0402JR-071ML, Case/Package=0402, Case Code (Metric)=1005, Manufacturer 1=Yageo, Max Operating Temperature=155°C, Max Power Dissipation=63mW, Min Operating Temperature=-55°C, Package Quantity=1, Power Rating=62.5mW, Resistance=1MR, Supplier Part Number 1=311-1.0MJRCT-ND, Temperature Coefficient=100ppm/°C, Tolerance=5%, Voltage Rating=50V, Case Code (Imperial)=0402, ComponentLink1Description=http://www.yageo.com/documents/recent/PYu-RC_Group_51_RoHS_L_10.pdf?src-supplier=Digi-Key, ComponentLink1URL=http://www.yageo.com/documents/recent/PYu-RC_Group_51_RoHS_L_10.pdf?src-supplier=Digi-Key, ComponentLink2Description=http://www.farnell.com/datasheets/1018594.pdf?src-supplier=Element14, ComponentLink2URL=http://www.farnell.com/datasheets/1018594.pdf?src-supplier=Element14, ComponentLink3Description=http://www.yageo.com/documents/recent/PYu-RC_Group_51_RoHS_L_9.pdf?src-supplier=Mouser, ComponentLink3URL=http://www.yageo.com/documents/recent/PYu-RC_Group_51_RoHS_L_9.pdf?src-supplier=Mouser, ComponentLink4Description=http://www.yageo.com/documents/recent/PYu-RC0402_51_RoHS_L_6_r.pdf?src-supplier=Future+Electronics, ComponentLink4URL=http://www.yageo.com/documents/recent/PYu-RC0402_51_RoHS_L_6_r.pdf?src-supplier=Future+Electronics, Composition="Thick Film", Depth=0.5mm, Features="Moisture Resistant", Height=0.016inch, Lead Free="Lead Free", Length=1mm, Manufacturer Part Number 1=RC0402JR-071ML, Military Standard=Not, Number of Terminations=2, Packaging="Tape and Reel", Pricing 1="1=0.1, 10=0.013, 100=0.0055, 1000=0.00245, 2500=0.00212, 5000=0.00176 (USD)", REACH SVHC="No SVHC", Stock 1=2904136, Supplier 1=Digi-Key, Termination=SMD/SMT, Weight=2.3E-05oz, Width=0.02inch
U1: "GYRO/ACCELEROMETER 6AXIS 24QFN", Case/Package=QFN, Manufacturer="TDK InvenSense", Max Operating Temperature=85°C, Min Operating Temperature=-40°C, Operating Supply Voltage=3.45V, Package Quantity=5000, Supplier Part Number 1=1428-1011-1-ND, ComponentLink1Description=http://store.invensense.com/Datasheets/invensense/RM-MPU-6500A-00.pdf, ComponentLink1URL=http://store.invensense.com/Datasheets/invensense/RM-MPU-6500A-00.pdf, Manufacturer Part Number=MPU-6500, Mount="Surface Mount", Number of Pins=24, Output Type=Digital, Pricing 1="1=8.31, 5=7.288, 10=6.559, 25=5.83, 50=5.3928, 100=4.664, 500=4.3725, 1000=4.081 (USD)", Sensor Type=Accelerometer,Gyroscope, Stock 1=29119, Supplier 1=Digi-Key
U2: library part BL652-SA-01-T/R, Case/Package=Module, Manufacturer=Laird, Supplier Part Number 1=BL652-SA-01-CT-ND, Manufacturer Part Number=BL652-SA-01-T/R, Pricing="1=7.45 (USD)", Stock=7566, Supplier 1=Digi-Key
U3: library part MCP73831T-2ACI/OT, Case/Package=SOT-23, Drain to Source Resistance=350mR, Manufacturer 1=Microchip, Max Charge Current=500mA, Max Input Voltage=6V, Max Operating Temperature=85°C, Max Output Voltage=4.5V, Max Power Dissipation=1.54W, Min Operating Temperature=-40°C, Min Output Voltage=4.168V, Min Supply Voltage=3.75V, Output Voltage=4.2V, Supplier Part Number 1=MCP73831T-2ACI/OTCT-ND, Voltage Rating=4.534V, ComponentLink1Description=http://www.microchip.com/mymicrochip/filehandler.aspx?ddocname=en023833&src-supplier=Digi-Key, ComponentLink1URL=http://www.microchip.com/mymicrochip/filehandler.aspx?ddocname=en023833&src-supplier=Digi-Key, ComponentLink2Description=http://www.farnell.com/datasheets/630369.pdf?src-supplier=Element14, ComponentLink2URL=http://www.farnell.com/datasheets/630369.pdf?src-supplier=Element14, ComponentLink3Description=http://www.farnell.com/datasheets/2124927.pdf?src-supplier=Element14, ComponentLink3URL=http://www.farnell.com/datasheets/2124927.pdf?src-supplier=Element14, ComponentLink4Description=http://ww1.microchip.com/downloads/en/DeviceDoc/21984e.pdf?src-supplier=Avnet, ComponentLink4URL=http://ww1.microchip.com/downloads/en/DeviceDoc/21984e.pdf?src-supplier=Avnet, ComponentLink5Description=http://www.farnell.com/datasheets/2124927.pdf?src-supplier=Newark, ComponentLink5URL=http://www.farnell.com/datasheets/2124927.pdf?src-supplier=Newark, ComponentLink6Description=http://www.microchip.com/mymicrochip/filehandler.aspx?ddocname=en025112&src-supplier=Future+Electronics, ComponentLink6URL=http://www.microchip.com/mymicrochip/filehandler.aspx?ddocname=en025112&src-supplier=Future+Electronics, ComponentLink7Description=http://www.produktinfo.conrad.com/datenblaetter/650000-674999/651521-da-01-en-CONTR__MCP73831T_2ACI_OT_SOT_23_5_MCP.pdf?src-supplier=Conrad, ComponentLink7URL=http://www.produktinfo.conrad.com/datenblaetter/650000-674999/651521-da-01-en-CONTR__MCP73831T_2ACI_OT_SOT_23_5_MCP.pdf?src-supplier=Conrad, Contact Plating=Tin,Matte, Height=0.051inch, Lead Free="Lead Free", Length=0.122inch, Manufacturer Part Number 1=MCP73831T-2ACI/OT, Max Supply Voltage=6V, Mount="Surface Mount", Number of Cells=1, Number of Channels=1, Number of Outputs=1, Number of Pins=5, Output Current=500mA, Packaging="Tape and Reel", Pricing 1="1=0.58, 25=0.484, 100=0.4326 (USD)", Radiation Hardening=No, REACH SVHC="No SVHC", Stock 1=48482, Supplier 1=Digi-Key, Termination=SMD/SMT, Weight=0.00709oz, Width=0.071inch
U4: "IC REG LDO 3.3V 0.15A SOT23-5", Case/Package=SOT-23, Current Rating=150mA, Dropout Voltage=300mV, Input Bias Current=85uA, Manufacturer 1="Texas Instruments", Max Input Voltage=10V, Max Operating Temperature=125°C, Max Output Voltage=3.3V, Max Power Dissipation=555mW, Min Current Limit=500mA, Min Input Voltage=2.7V, Min Operating Temperature=-40°C, Output Voltage Accuracy=3%, Package Quantity=1, Quiescent Current=80uA, Supplier Part Number 1=296-2705-6-ND, Accuracy=3%, ComponentLink1Description=https://datasheet.ciiva.com/30507/tps76333dbvt-30507683.pdf, ComponentLink1URL=https://datasheet.ciiva.com/30507/tps76333dbvt-30507683.pdf, ComponentLink2Description=https://datasheet.ciiva.com/25626/0900766b8062816d-25626741.pdf, ComponentLink2URL=https://datasheet.ciiva.com/25626/0900766b8062816d-25626741.pdf, ComponentLink3Description=https://datasheet.ciiva.com/46390/1882045-46390261.pdf, ComponentLink3URL=https://datasheet.ciiva.com/46390/1882045-46390261.pdf, ComponentLink4Description=https://datasheet.ciiva.com/27049/763729-27049869.pdf, ComponentLink4URL=https://datasheet.ciiva.com/27049/763729-27049869.pdf, ComponentLink5Description=https://datasheet.ciiva.com/41462/001015062-da-01-en-ic-reg-ldo-3-3v-0-tps76333dbvt-sot-5-tid-41462909.pdf, ComponentLink5URL=https://datasheet.ciiva.com/41462/001015062-da-01-en-ic-reg-ldo-3-3v-0-tps76333dbvt-sot-5-tid-41462909.pdf, ComponentLink6Description=https://datasheet.ciiva.com/26904/tps76333dbvt-26904174.pdf, ComponentLink6URL=https://datasheet.ciiva.com/26904/tps76333dbvt-26904174.pdf, Contact Plating=Gold, Description 1="IC REG LDO 3.3V 0.15A SOT23-5", Height=1.15mm, Lead Free="Lead Free", Length=2.9mm, Manufacturer Part Number 1=TPS76333DBVT, Max Output Current=150mA, Max Supply Voltage=10V, Min Output Voltage=3.3V, Min Supply Voltage=2.7V, Nominal Output Voltage=3.3V, Number of Outputs=1, Number of Pins=5, Number of Regulators=1, Output Current=150mA, Output Voltage=3.3V, Packaging="Tape and Reel", Polarity=Positive, Power Dissipation=555mW, Power Rating=555mW, Pricing 1="1=0.96, 10=0.857, 100=0.6681 (USD)", Radiation Hardening=No, REACH SVHC="No SVHC", Stock 1=3719, Supplier 1=Digi-Key, Termination=SMD/SMT, Voltage=3.3V, Width=1.6mm

## Free pads (board coordinates)
  round 1.2 hole 0.75: 2(-6.6,32.91) 2(-4.5,38.25) 3(-4.5,35.71)

## Via types
v1: diameter 0.8, hole 0.4, Top Layer to Bottom Layer, tented both sides, 14 vias
v2: diameter 0.6, hole 0.3, Top Layer to Bottom Layer, tented both sides, 12 vias
v3: diameter 0.4, hole 0.2, Top Layer to Bottom Layer, tented bottom, 5 vias
v4: diameter 0.762, hole 0.406, Top Layer to Bottom Layer, tented both sides, 2 vias

## Nets (pads, with @x,y where several pads share a name; then routed paths per layer and width w, separated by ;. In a path a pad name is that pad's centre, name@x,y a point inside that pad or via, vN(x,y) a via of type N, cw(c..) or ccw(c..) an arc to the next point about the centre after c; other vN are vias at no path point)
+3V3: C1.1 C2.1 C4.2 C5.1 C11.1 D1.2 J1.6 U1.8 U1.13 U2.26 U4.5 | length 59.5
  Top Layer w0.254: v2(-3,36.85) C2.1 U1.13 ; D1.2 cw(c-2.25,12.216) -2.933,11.533 cw(c-2.288,12.178) -3.2,12.178 -3.2,13.267 cw(c-2.517,13.267) -3,13.75 cw(c-2.457,13.207) -2.457,13.975 C11.1 U4.5 ; U1.8 0.6,37.188 1,37.588 C1.1 v2(1,38.6) ; C5.1 5.5,19.617 cw(c6.183,19.617) 5.7,20.1 ccw(c5.338,20.462) 5.85,20.462 C4.2 ; v2(5.85,21.7) v2@5.85,21.938
  Top Layer w0.406: v4(-4.4,41.9) J1.6@-2.54,41.9 ; U4.5 0.05,18.272 cw(c1.928,18.272) 0.6,19.6 cw(c1.324,18.876) v2(1.324,19.9) ; C4.2 v2(5.85,21.7) ; v2@5.85,21.938 ccw(c5.338,21.938) 5.7,22.3 cw(c6,22.6) 5.576,22.6 5.576,23.365 ; v4(5.976,29.7) ccw(c5.976,29.3) 5.576,29.3 5.576,23.365 ; U2.26 6.111,23.9 ccw(c6.111,23.365) 5.576,23.365
  Bottom Layer w0.406: v4(-4.4,41.9) -4.4,39.6 -3,38.2 ; v2(-3,36.85) -3,38.2 ; v2(1.324,19.9) 2.272,19.9 ccw(c2.272,21.607) 3.479,20.4 4.036,20.956 cw(c5.832,19.16) 5.832,21.7 v2(5.85,21.7) ; v4(5.976,29.7) cw(c5.976,30.368) 5.307,30.368 5.307,37.969 ccw(c4.577,37.969) 4.577,38.7 1.9,38.7 1.8,38.6 v2(1,38.6) 0.523,38.6 0.382,38.741 -2.459,38.741 -3,38.2
+5V: C7.1 J3.1 R1.1 U3.4 | length 9.3
  Top Layer w0.254: R1.1 C7.1
  Top Layer w0.762: J3.1 2.65,4.302 cw(c4.698,4.302) 3.25,5.75 ccw(c2.646,6.354) 3.5,6.354 C7.1 3.5,8.5 cw(c3.983,8.983) 3.3,8.983 U3.4
+VBATT: C6.1 C8.1 C10.1 J1.5 J1.8 J2.1 U3.3 U4.1 U4.3 | length 67.9
  Top Layer w0.635: v2(0,40.38) J1.8 ; U4.1 0.05,12.284 cw(c0.733,12.284) 0.25,12.767 cw(c0.812,12.205) 0.812,13 2.896,13 ccw(c2.896,13.854) C8.1 ; C10.1 1.9,11.404 cw(c2.071,11.404) U4.3 cw(c2.433,11.042) 2.433,11.725 U3.3 3.3,12.767 cw(c3.983,12.767) C8.1 ; C6.1 cw(c5.5,18.678) 4.561,17.739 3.762,18.538 ccw(c3.25,18.026) J2.1 2,18.75 ccw(c2,18) 1.25,18 1.25,16.25 ccw(c2.25,16.25) 2.25,15.25 2.749,15.25 cw(c2.749,14.5) 3.499,14.5 C8.1
  Bottom Layer w0.406: J1.5@-2.539,44 v2(-3.499,44) -3.499,40.901 -3.756,40.644 -3.756,39.828 -3.227,39.3 -0.418,39.3 ccw(c-0.418,39.718) 0,39.718 v2(0,40.38)
  Bottom Layer w0.635: v2(-3.499,44) -4.501,44 ccw(c-4.501,42.001) -6.5,42.001 -6.5,35.721 ccw(c-4.779,35.721) -4.779,34 -3.325,34 cw(c-3.325,33.1) -2.425,33.1 ccw(c-1.625,33.1) -1.625,32.3 -1.4,32.3 cw(c-1.4,31.5) -0.6,31.5 -0.6,19.839 ccw(c0.489,19.839) 0.489,18.75 J2.1
CHRG_STAT: U2.34 U3.1 | length 14.8
  Top Layer w0.254: U2.34 1.75,21.503 ccw(c2.603,21.503) 2,20.9 ccw(c2.483,21.383) 2.483,20.7 3.917,20.7 cw(c3.917,20.017) 4.4,20.5 cw(c4.159,20.259) 4.5,20.259 4.5,19.276 ccw(c5.576,19.276) 5.576,18.2 cw(c5.576,17.176) 6.6,17.176 6.6,12.767 cw(c6.333,12.767) 6.333,12.5 5.5,12.5 ccw(c5.5,12.2) 5.2,12.2 U3.1
GND: C1.2 C2.2 C3.2 C4.1 C5.2 C6.2 C7.2 C8.2 C9.2 C10.2 C11.2 J1.2 J1.3 J2.2 pad.2@-6.6,32.91 Q1.3 R2.2 R3.1 U1.18 U1.20 U1.25 U2.1 U2.16 U2.27 U2.39 U3.2 U4.2 | length 22.3
  Top Layer w0.203: v2(-1.6,33.6) -1.5,33.7 U1.18 ; U1.20 -0.6,34.65 v3(0,35.25)
  Top Layer w0.254: C9.2 cw(c-5.421,12.379) -5.25,12.379 R3.1 ; C2.2 v2(-2.4,35.45) ; v2(-1.6,38) C3.2 ; U4.2 cw(c0.759,11.284) 1.1,11.284 C10.2 ; C1.2 v2(2.4,38)
  Top Layer w0.305: C9.2 v1(-5.3,13.4) ; U2.1 v1(-5,32.9) ; v1(-2.4,12.475) C11.2 ; U2.39 -2,21.224 ccw(c-0.976,21.224) v1(-1.7,20.5) ; v1(-1,8.7) Q1.3 ; v1(0.2,10.25) C10.2 ; v1(4.25,10.825) U3.2 ; C7.2 v1(5.9,7.75) ; C8.2 v1(5,14.15) ; v1(5.5,14.95) C6.2 ; v1(6.25,30.7) U2.16 ; C4.1 6.65,20.418 ccw(c7.162,20.418) 6.8,20.056 cw(c6.317,19.573) 7,19.573 C5.2 v1(7,18.35) ; v1(6.7,22.3) U2.27 ; R2.2 v1(6.75,11.85)
  other v3: -0.4,34.75 0.4,34.75 -0.4,35.75 0.4,35.75
IMU_INT: U1.12 U2.12 | length 16.4
  Top Layer w0.203: U1.12 -1,37 ccw(c-1.4,37) -1.4,37.4 -1.698,37.4 cw(c-1.698,38.002) -2.3,38.002 -2.3,38.4 cw(c-1.7,38.4) -1.7,39 -0.6,39 ccw(c-0.6,39.2) -0.4,39.2 cw(c-0.09,39.2) -0.09,39.51 2.693,39.51 cw(c2.693,38.704) 3.499,38.704 3.499,36.549 3.25,36.3 U2.12
IMU_MISO: U1.9 U2.11 | length 12.2
  Top Layer w0.203: U1.9 0.2,37.327 0.4,37.527 0.4,38.783 cw(c0.771,38.783) 0.771,39.154 2.546,39.154 cw(c2.546,38.746) 2.954,38.746 2.954,36.704 2.5,36.25 U2.11
IMU_MOSI: U1.24 U2.10 | length 2.2
  Top Layer w0.203: U1.24 1,33.483 ccw(c1.683,33.483) 1.2,33 1.29,32.91 cw(c0.181,31.8) U2.10
IMU_SCK: U1.23 U2.9 | length 2.1
  Top Layer w0.203: U1.23 0.6,33.141 ccw(c0.941,33.141) 0.7,32.9 0.829,32.771 cw(c0.417,32.358) 1,32.358 U2.9
IMU_SS: U1.22 U2.8 | length 2
  Top Layer w0.203: U1.22 0.2,31.921 ccw(c0.371,31.921) U2.8
LED_CLK: J1.4 U2.2 | length 16.4
  Top Layer w0.305: U2.2 -4.25,33.2 -6.4,35.35 -6.4,38.9 cw(c-5.2,38.9) -5.2,40.1 v2(-3.1,40.1)
  Bottom Layer w0.305: v2(-3.1,40.1) -1.62,40.1 ccw(c-1.62,40.42) -1.3,40.42 J1.4@-1.3,42.9
LED_LE: J1.9 U2.13 | length 13.3
  Top Layer w0.254: J1.9 1.27,40.38 ccw(c1.65,40.38) 1.65,40 3.1,40 cw(c3.1,39.1) 4,39.1 U2.13
LED_MISO: J1.10 U2.14 | length 12.6
  Top Layer w0.254: J1.10 2.54,40.96 ccw(c2.9,40.96) 2.9,40.6 3.5,40.6 cw(c3.5,39.35) 4.75,39.35 U2.14
LED_MOSI: J1.1 U2.15 | length 13.5
  Top Layer w0.305: v2(3.5,42.9) 4.152,42.9 cw(c4.152,41.552) 5.5,41.552 U2.15
  Bottom Layer w0.305: J1.1 v2(3.5,42.9)
LED_PWCLK: J1.7 U2.3 | length 15.9
  Top Layer w0.305: U2.3 -3.5,33.1 -5.8,35.4 -5.8,38.8 cw(c-5.105,38.8) -5.105,39.495 -2.205,39.495 ccw(c-2.205,40.43) -1.27,40.43 J1.7
NetC3_1: C3.1 U1.10 | length 1.3
  Top Layer w0.203: U1.10 C3.1
NetD1_1: D1.1 Q2.2 | length 1.6
  Top Layer w0.254: Q2.2 D1.1
NetJ3_2: J3.2 Q1.2 Q2.1 | length 6.4
  Top Layer w0.762: Q2.1 Q1.2 -2.25,7.104 cw(c-3.104,7.104) -2.5,6.5 ccw(c-2.138,6.138) -2.65,6.138 J3.2
NetQ1_1: Q1.1 R1.2 | length 4.5
  Top Layer w0.254: Q1.1 -0.962,9.65 cw(c-0.962,9.138) -0.6,9.5 ccw(c-0.359,9.741) -0.359,9.4 1.198,9.4 cw(c1.198,8.973) 1.5,9.275 cw(c0.896,8.671) 1.75,8.671 R1.2
NetR2_1: R2.1 U3.5 | length 1.8
  Top Layer w0.254: U3.5 ccw(c5.2,11.146) 6.523,9.823 R2.1
SWDCLK: pad.2@-4.5,38.25 U2.6 | length 7.8
  Top Layer w0.254: pad.2@-4.5,38.25 -4.5,37.5 -3.546,36.546 -3.546,34.646 -1.25,32.35 U2.6
SWDIO: pad.3 U2.5 | length 4.9
  Top Layer w0.254: pad.3 -4.5,34.841 -2,32.341 U2.5
TOUCH_IN: C9.1 Q2.3 R3.2 U2.35 | length 16.1
  Top Layer w0.254: Q2.3 R3.2 -6.15,12.379 cw(c-5.979,12.379) C9.1 -6.1,12.851 cw(c-4.051,12.851) -5.5,14.3 0.256,20.056 ccw(c-1.54,21.852) 1,21.852 U2.35
pads on no net: U1.1 U1.2 U1.3 U1.4 U1.5 U1.6 U1.7 U1.11 U1.14 U1.15 U1.16 U1.17 U1.19 U1.21 U2.4 U2.7 U2.20 U2.21 U2.22 U2.23 U2.24 U2.25 U2.32 U2.33 U2.36 U2.37 U2.38 U4.4

## Polygon pours and split planes (outlines as drawn)
GND on Bottom Layer "GND_L02_P000" (solid, pour order 0): -8,0 -8,45 8,45 8,0
GND on Top Layer "GND_L01_P002" (solid, pour order 2): -8,0 -8,45 8,45 8,0

## Keep-outs
Top Layer:
  region: -8,18.3 -8,31 -2.425,31 -2.425,18.317 -3.5,18.317
Bottom Layer:
  region: -8,31 -8,18.3 -2.425,18.3 -2.425,30.983 -3.5,30.983

## Silkscreen, mask and mechanical layers (free items; w line width, h text height)
Top Solder:
  text "Juno LED Central V1R1" at 7.6,32.6 h1.5 r90
Mechanical 1:
  the board outline again, w0.203